# Altium PCB Dashboard.PcbDoc
Units mm, origin at the board's own origin, x right, y up, seen from the top; angles counter-clockwise.
Board outline 121.9 x 100 mm, 2 copper layers (Top Layer, Bottom Layer); 41 components, 91 nets, 229 pads, 85 vias.
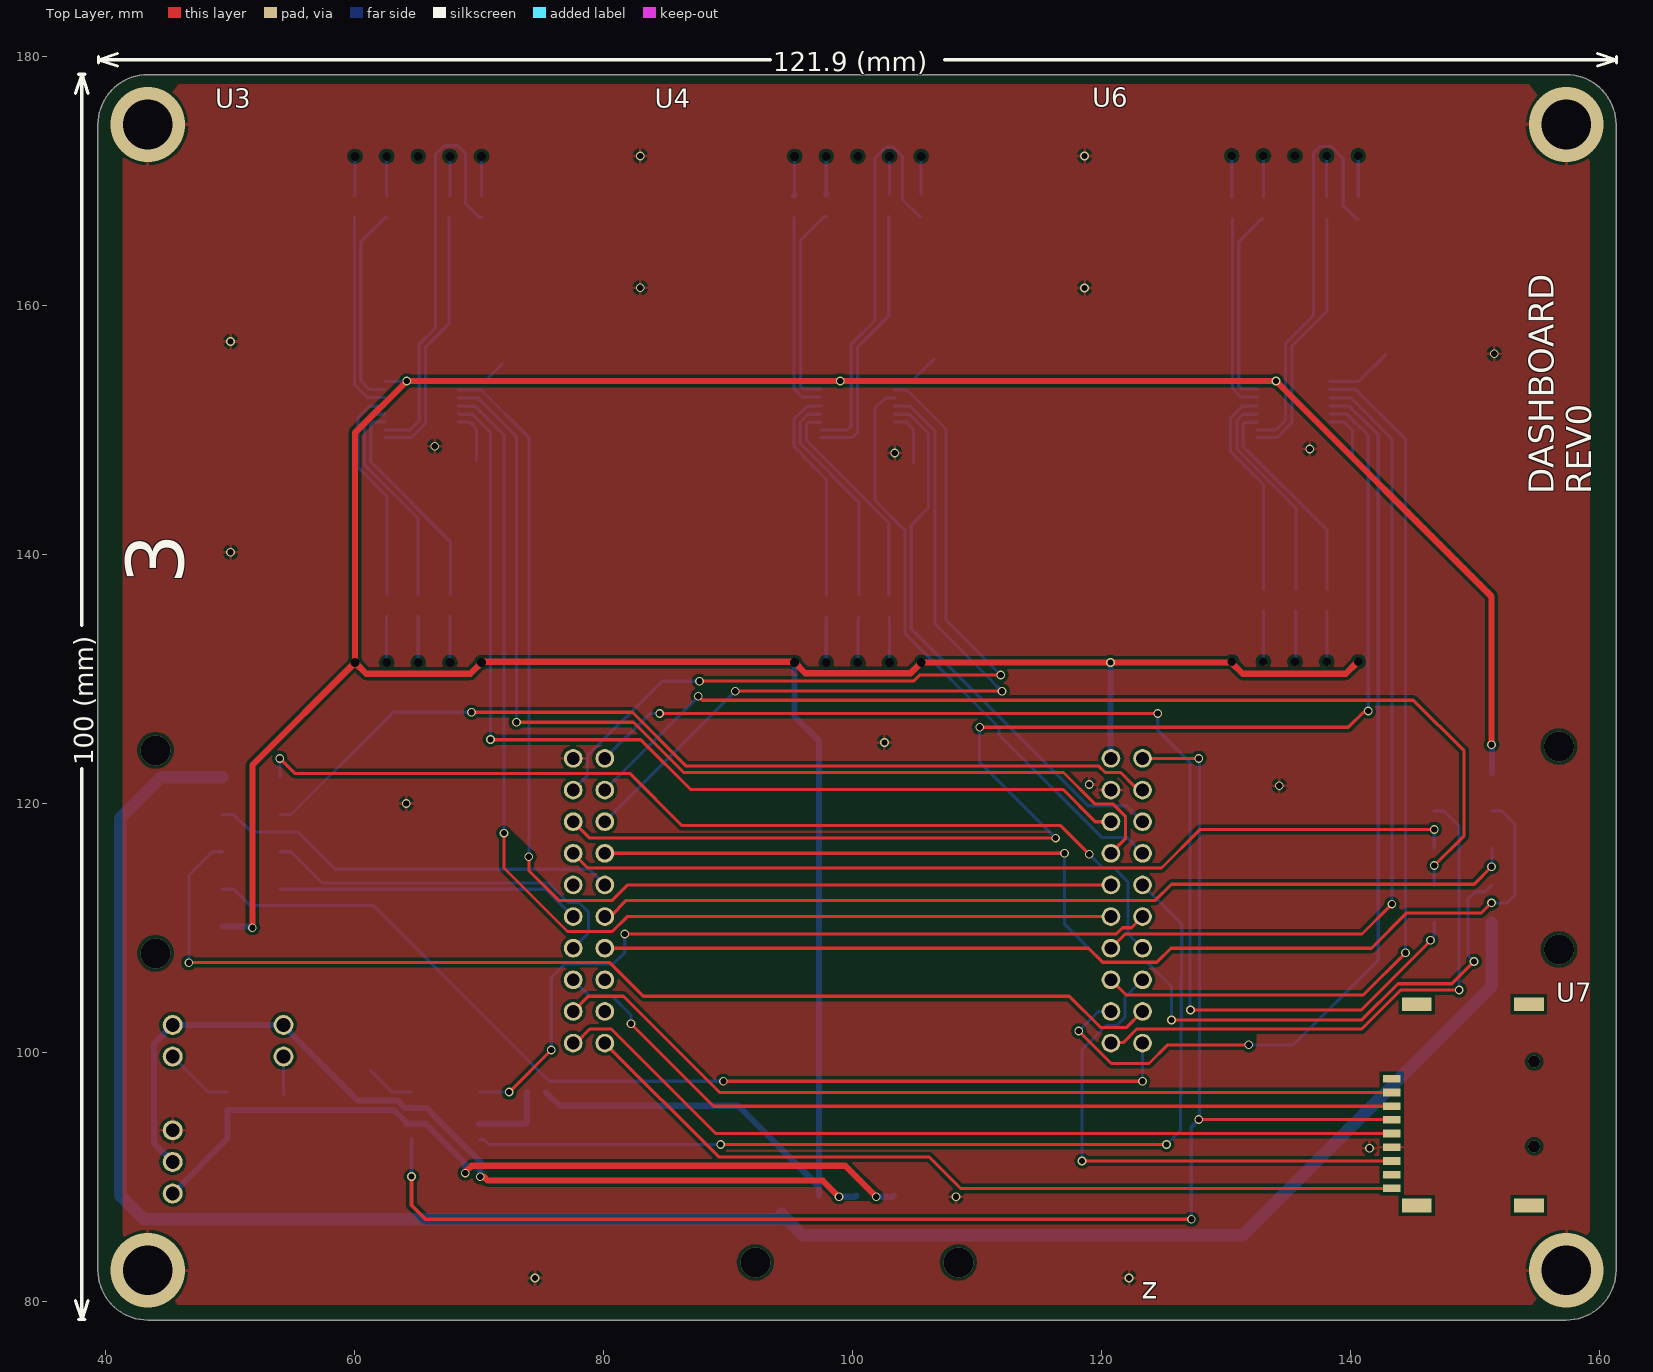
[diagram p0: Top Layer view]
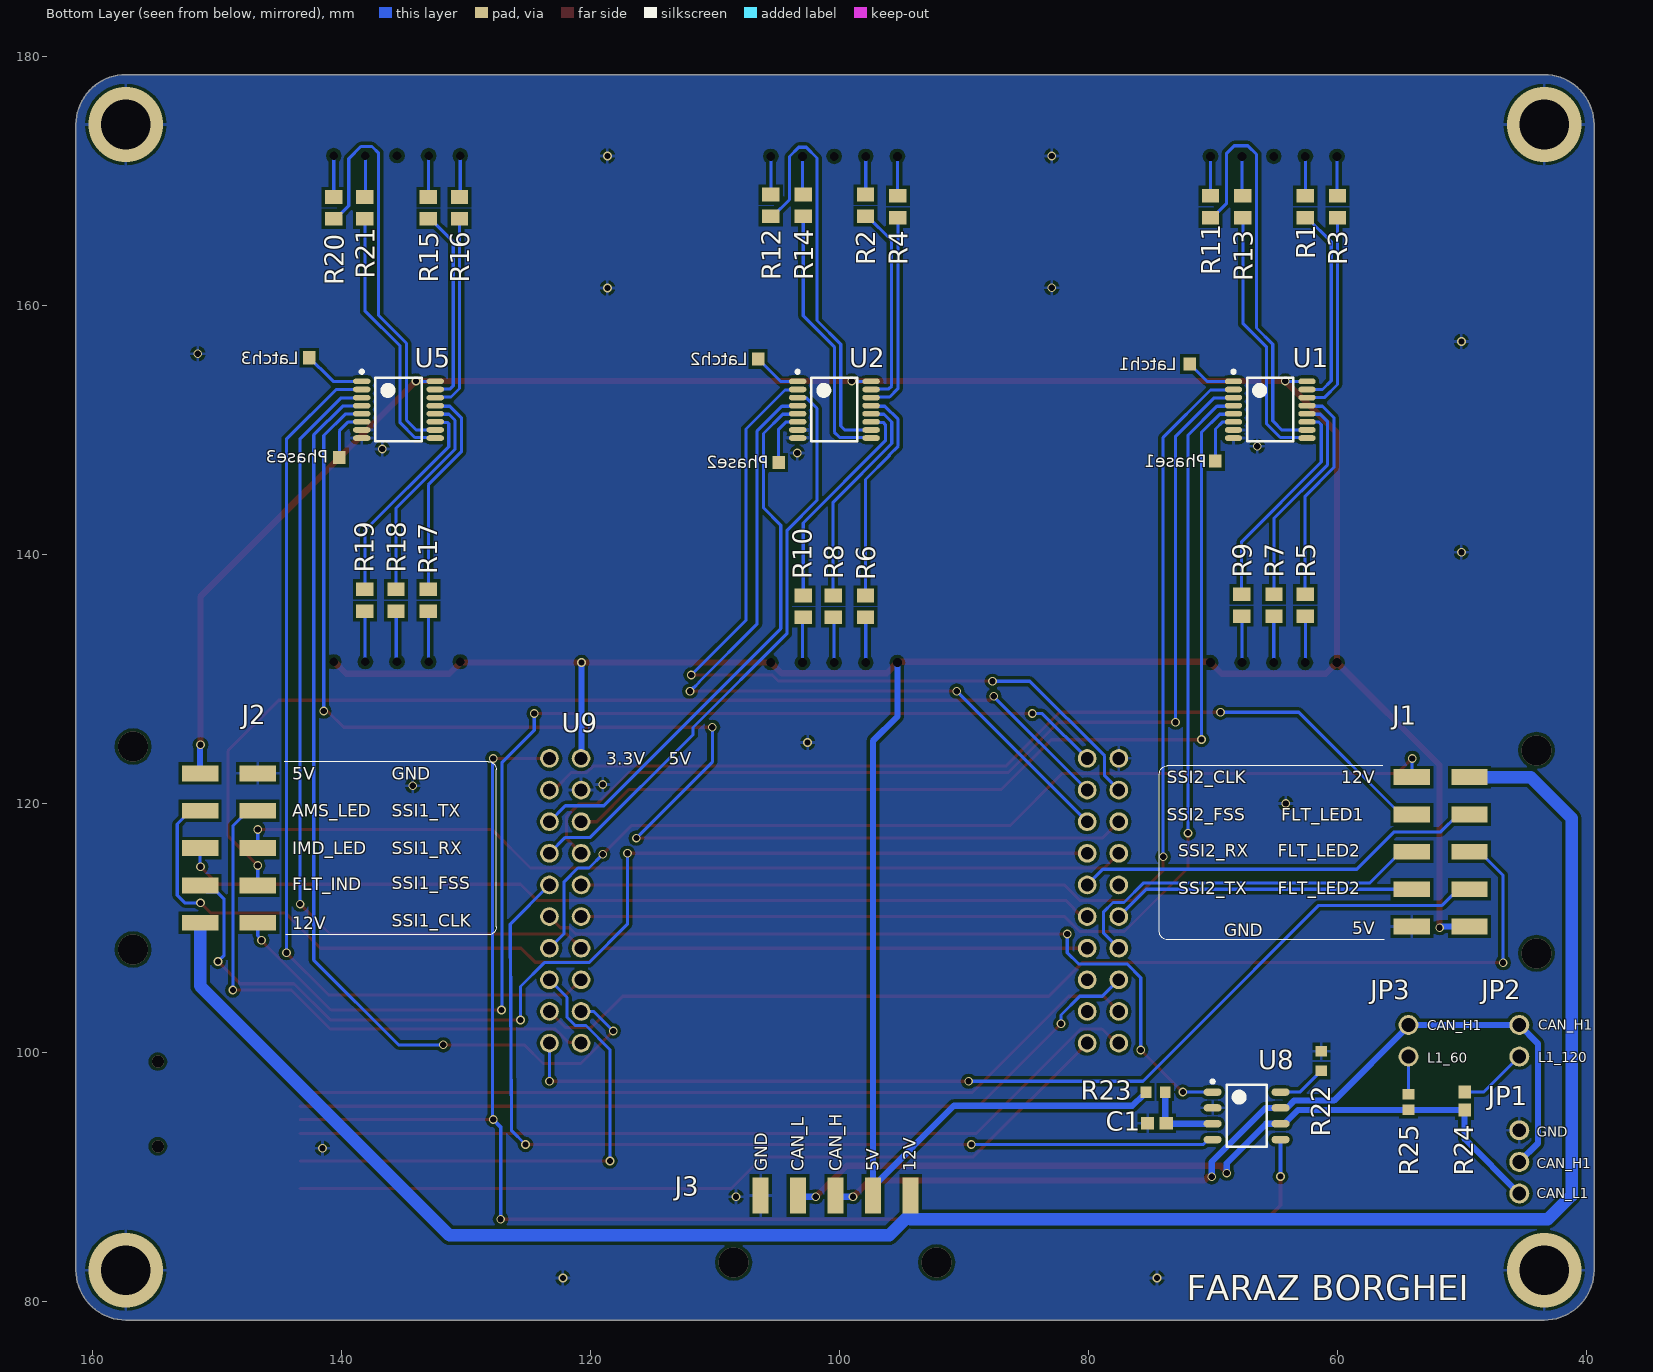
[diagram p1: Bottom Layer view, seen from below]

## Layer stack, top to bottom
Top Solder: solder mask 0.0102, Solder Resist, Dk 3.5
Top Layer: signal copper 0.0356
Dielectric 1: dielectric 0.32, FR-4, Dk 4.8
Bottom Layer: signal copper 0.0356
Bottom Solder: solder mask 0.0102, Solder Resist, Dk 3.5

## Board outline
39.4,82.5 39.4,174.5 cw(c43.4,174.5) 43.4,178.5 157.3,178.5 cw(c157.3,174.5) 161.3,174.5 161.3,82.5 cw(c157.3,82.5) 157.3,78.5 43.4,78.5 cw(c43.4,82.5)

## Design rules (kind name [scope] priority, off if disabled: settings)
Clearance [All] p1: gap=0.254 ignorepadtopadclearanceinfootprint=TRUE except(0: Arc-Hole Track-Hole SMDPad-Hole THPad-Hole Via-Hole Fill-Hole Poly-Hole Region-Hole Text-Hole)
HoleSize [All] p1: absolutevalues=TRUE maxlimit=7 minlimit=0.025 maxpercent=80.000 minpercent=20.000
MinimumSolderMaskSliver [All] p1: minsoldermaskwidth=0.1
NetAntennae [All] p1 off: netantennaetolerance=0
PolygonConnect [All] p1: connectstyle=Relief reliefconductorwidth=0.254 reliefentries=4 polygonreliefangle="90 Angle" airgapwidth=0.254
RoutingVias [All] p1: holewidth=0.711 width=1.27 viastyle="Through Hole" minholewidth=0.5 minwidth=0.5 maxholewidth=6 maxwidth=6
SolderMaskExpansion [All] p1: expansion=0.102
Width [All] p1: maxlimit=1 minlimit=0.1 preferedwidth=0.254 minimp=50.000000 maximp=50.000000 favimp=50.000000
27 further rules are at their usual default settings.

## Classes and differential pairs
component class Headers: J1 J2 J3 U7 U9
component class CANTransceiver: C1 JP1 JP2 JP3 R22 R23 R24 R25 U8
component class 7SegDisplay: R1 R2 R3 R4 R5 R6 R7 R8 R9 R10 R11 R12 R13 R14 R15 R16 R17 R18 R19 R20 R21 U1 U2 U3 U4 U5 U6

## Components (designator, comment, footprint, x,y, rotation, side; value= is the part's Value field where it differs from the comment)
C1 "100nF" CAPC1608X10N 74.5,94.3 r180 bottom
J1 "WM3255CT-ND" MOLEX-10PIN 44.018,124.25 r90 bottom
J2 "WM3255CT-ND" MOLEX-10PIN 156.71,108.25 r270 bottom locked
J3 "23-0436500509CT-ND" MOLEX-5PIN 92.185,83.125 r180 bottom
JP1 "61300311121" 61300311121 45.4,88.66 r270 bottom
JP2 "61300211121" 61300211121 45.4,99.66 r270 bottom
JP3 "61300211121" 61300211121 54.3,99.66 r270 bottom
R1 "200Ohm" RES-0805 62.6,167.9 r90 bottom
R2 "200Ohm" RES-0805 97.9,168 r90 bottom
R3 "200Ohm" RES-0805 60,167.9 r90 bottom
R4 "200Ohm" RES-0805 95.3,167.9 r90 bottom
R5 "200Ohm" RES-0805 62.6,135.9 r270 bottom
R6 "200Ohm" RES-0805 97.9,135.8 r270 bottom
R7 "200Ohm" RES-0805 65.1,135.9 r270 bottom
R8 "200Ohm" RES-0805 100.5,135.8 r270 bottom
R9 "200Ohm" RES-0805 67.7,135.9 r270 bottom
R10 "200Ohm" RES-0805 102.9,135.8 r270 bottom
R11 "200Ohm" RES-0805 70.2,167.9 r90 bottom
R12 "200Ohm" RES-0805 105.5,168 r90 bottom
R13 "200Ohm" RES-0805 67.6,167.9 r90 bottom
R14 "200Ohm" RES-0805 102.9,168 r90 bottom
R15 "200Ohm" RES-0805 133,167.8 r90 bottom
R16 "200Ohm" RES-0805 130.5,167.8 r90 bottom
R17 "200Ohm" RES-0805 133,136.3 r270 bottom
R18 "200Ohm" RES-0805 135.6,136.3 r270 bottom
R19 "200Ohm" RES-0805 138.1,136.3 r270 bottom
R20 "200Ohm" RES-0805 140.6,167.8 r90 bottom
R21 "200Ohm" RES-0805 138.1,167.8 r90 bottom
R22 "0Ohm" RES-0603 61.3,99.3 r90 bottom
R23 "0Ohm" RES-0603 74.6,96.8 r0 bottom
R24 "120 Ohm" RESC1608X06N 49.8,96.1 r90 bottom
R25 "60.4 Ohm" "60.4 OHM RES 0603" 54.3,96 r90 bottom
U1 "7 Seg BCD" TSOP65P640X120-16N 65.4,151.6 r180 bottom
U2 "7 Seg BCD" TSOP65P640X120-16N 100.4,151.6 r180 bottom
U3 "754-2271-ND" SA15-11EWA 60.04,131.3 r0 top
U4 "754-2271-ND" SA15-11EWA 95.34,131.3 r0 top
U5 "7 Seg BCD" TSOP65P640X120-16N 135.4,151.6 r180 bottom
U6 "754-2271-ND" SA15-11EWA 130.44,131.36 r0 top locked
U7 "2073-MEM2075-00-140-01-ACT-ND" SDCARD-NORMAL 143.3,97.875 r90 top
U8 "MCP2562-E/SN" SOIC127P600X175-8N 67.3,94.9 r180 bottom
U9 "EK-TM4C123GXL" "TIVA Headers" 123.28,123.6 r180 bottom locked

## Footprints (in the part's own frame and the unit in brackets; to place one, negate y for a bottom-side part, rotate by r counter-clockwise, add the part's x,y. Pads: shape width x height; smd on the part's side, far side on the other; paste and mask are expansions set on the pad)
"60.4 OHM RES 0603" [mm] "60.4 Ohms ±1% 0.1W, 1/10W Chip Resistor 0603 (1608 Metric) Automotive AEC-Q200 Thick Film"
  rect 0.85x0.95 smd: 1(-0.625,0) 2(0.625,0)
  body extent -0.85,-0.48 0.85,0.47, height 0.55
61300211121 [mm] "Connector Header Through Hole 2 position 0.100\" (2.54mm)"
  round 1.6 hole 1.1: 1(0,0) 2(-2.54,0)
  body extent -3.84,-1.27 1.24,1.27, height 8.27
61300311121 [mm] "Connector Header Through Hole 3 position 0.100\" (2.54mm)"
  round 1.6 hole 1.1: 1(0,0) 2(-2.54,0) 3(-5.08,0)
  body extent -6.35,-1.27 1.27,1.27, height 8.27
CAPC1608X10N [mm] "Chip Capacitor, 2-Leads, Body 1.60x0.80mm, IPC Medium Density"
  rect 1.05x1 smd: 1(-0.75,0) 2(0.75,0)
  body extent -0.87,-0.48 0.88,0.47, height 0.95
MOLEX-5PIN [mm] "Connector Header Surface Mount, Right Angle 5 position 0.118\" (3.00mm)"
  rect 1.27x2.92 smd: 1(-2.09,5.375) 2(-5.115,5.375) 3(-8.115,5.375) 4(-11.14,5.375) 5(-14.14,5.375)
  body extent -17.44,-4.63 1.2,6.11, height 5.14
MOLEX-10PIN [mm] "Connector Header Surface Mount, Right Angle 10 position 0.118\" (3.00mm)"
  rect 1.27x2.92 smd: 1(-2.15,5.38) 2(-5.15,5.38) 3(-8.15,5.38) 4(-11.15,5.38) 5(-14.15,5.38) 6(-2.15,10.01) 7(-5.15,10.01) 8(-8.15,10.01) 9(-11.15,10.01) 10(-14.15,10.01)
  body extent -17.62,-4.6 1.53,10.8, height 8.73
RES-0603 [mm] "Chip Resistor, 2-Leads, Body 1.60x0.80mm, IPC Medium Density"
  rect 0.85x0.9 smd: 1(-0.775,0) 2(0.775,0)
  body extent -0.85,-0.45 0.85,0.45, height 0.55
RES-0805 [mm] "Chip Resistor, 2-Leads, Body 2.00x1.25mm, IPC Medium Density"
  rect 1.1x1.4 smd: 1(-0.875,0) 2(0.875,0)
  body extent -1.07,-0.7 1.07,0.7, height 0.6
RESC1608X06N [mm] "Chip Resistor, 2-Leads, Body 1.60x0.80mm, IPC Medium Density"
  rect 1.05x1 smd: 1(-0.725,0) 2(0.725,0)
  body extent -0.9,-0.5 0.9,0.5, height 0.55
SA15-11EWA [mm] "1.5\" 7 Segment Display"
  round 0.5 hole 0.7: 1(0,0) 2(2.54,0) 3(5.08,0) 4(7.62,0) 5(10.16,0) 6(10.16,40.64) 7(7.62,40.64) 8(5.08,40.64) 9(2.54,40.64) 10(0,40.64)
  body extent -11.48,-3.2 21.68,43.8, height 12.5
SDCARD-NORMAL [mm] "9 (8 + 1) Position Card Connector microSD™ Surface Mount, Right Angle Gold"
  rect 0.62x1.4 smd: 1(0,0) 2(-1.1,0) 3(-2.2,0) 4(-3.3,0) 5(-4.4,0) 6(-5.5,0) 7(-6.6,0) 8(-7.7,0) 9(-8.8,0)
  rect 1.1x2.4 smd: 10(-10.175,-11) 10(-10.175,-2) 10(5.975,-2) 10(5.975,-11)
SOIC127P600X175-8N [mm] "SOIC, 8-Leads, Body 4.90x3.90mm, Pitch 1.27mm, IPC Medium Density"
  oval 1.45x0.6 smd: 1(-2.725,1.905) 2(-2.725,0.635) 3(-2.725,-0.635) 4(-2.725,-1.905) 5(2.725,-1.905) 6(2.725,-0.635) 7(2.725,0.635) 8(2.725,1.905)
  silkscreen extent -2.85,-2.5 1.6,2.88, body extent -3,-2.5 3,2.5, height 1.75
"TIVA Headers" [mm]
  round 1.5 hole 1.02: 1(0,0) 2(0,-2.54) 3(0,-5.08) 4(0,-7.62) 5(0,-10.16) 6(0,-12.7) 7(0,-15.24) 8(0,-17.78) 9(0,-20.32) 10(0,-22.86) 21(45.72,0) 22(45.72,-2.54) 23(45.72,-5.08) 24(45.72,-7.62) 25(45.72,-10.16) 26(45.72,-12.7) 27(45.72,-15.24) 28(45.72,-17.78) 29(45.72,-20.32) 30(45.72,-22.86) 31(2.54,0) 32(2.54,-2.54) 33(2.54,-5.08) 34(2.54,-7.62) 35(2.54,-10.16) 36(2.54,-12.7) 37(2.54,-15.24) 38(2.54,-17.78) 39(2.54,-20.32) 40(2.54,-22.86) 41(43.18,0) 42(43.18,-2.54) 43(43.18,-5.08) 44(43.18,-7.62) 45(43.18,-10.16) 46(43.18,-12.7) 47(43.18,-15.24) 48(43.18,-17.78) 49(43.18,-20.32) 50(43.18,-22.86)
  body extent -1.33,-24.1 46.97,1.6, height 8.55
TSOP65P640X120-16N [mm] "TSOP, 16-Leads, Body 5.00x4.40mm, Pitch 0.65mm, IPC Medium Density"
  oval 1.4x0.45 smd: 1(-2.95,2.275) 2(-2.95,1.625) 3(-2.95,0.975) 4(-2.95,0.325) 5(-2.95,-0.325) 6(-2.95,-0.975) 7(-2.95,-1.625) 8(-2.95,-2.275) 9(2.95,-2.275) 10(2.95,-1.625) 11(2.95,-0.975) 12(2.95,-0.325) 13(2.95,0.325) 14(2.95,0.975) 15(2.95,1.625) 16(2.95,2.275)
  silkscreen extent -3.08,-2.55 1.85,3.17, body extent -3.2,-2.55 3.2,2.55, height 1.2

## Part data
C1: library part C0603C104K4RAC7411, "Cap Ceramic 0.1uF 16V X7R 10% SMD 0603 125C Paper T/R", Case/Package=0603, Case Code (Metric)=1608, Dielectric=X7R, Dielectric Material=Ceramic, Manufacturer=KEMET, Max Operating Temperature=125°C, Min Operating Temperature=-55°C, Package Quantity=10000, Supplier Part Number 1=399-17393-1-ND, Tolerance=10%, Voltage Rating=16V, Capacitance=100nF, Case Code (Imperial)=0603, ComponentLink1Description=https://datasheet.ciiva.com/5411/kem-c1002-x7r-smd-357932-5411657.pdf?src-supplier=Mouser, ComponentLink1URL=https://datasheet.ciiva.com/5411/kem-c1002-x7r-smd-357932-5411657.pdf?src-supplier=Mouser, Depth=0.8mm, Dissipation Factor=3.5%, Height=0.8mm, Lead Pitch=0.7mm, Length=1.6mm, Manufacturer Part Number=C0603C104K4RAC7411, Mount="Surface Mount", Packaging="Tape and Reel", Pricing 1="1=0.14000, 10=0.09800, 100=0.04620, 500=0.03240, 1000=0.02683, 2500=0.02497, 5000=0.02285 (USD)", Radiation Hardening=No, RoHS=Yes, Stock 1=26049, Supplier 1=Digi-Key, Termination=SMD/SMT, Voltage Rating (DC)=16V, Width=0.8mm
J1 J2: library part MOLEX-10PIN, "HEADER R/A 10POS DUAL TIN SMD", Color=Black, Contact Resistance=10mR, Manufacturer=Molex, Manufacturer Part Number=0430451006, Max Operating Temperature=105°C, Min Operating Temperature=-40°C, ComponentLink1Description=https://datasheet.ciiva.com/737/430450407-sd-737953.pdf?src-supplier=Digi-Key, ComponentLink1URL=https://datasheet.ciiva.com/737/430450407-sd-737953.pdf?src-supplier=Digi-Key, Connector Type="Male Pin", Contact Material=Brass, Contact Plating=Tin, Depth=15.4mm, Fastening Type=Latch, Housing Color=Black, Housing Material=Polymer, Length=19.15mm, Mount="Surface Mount", Number of Contacts=10, Number of Positions=10, Number of Rows=2, Orientation="Right Angle", Packaging="Tape and Reel", Pitch=3mm, Pricing 1="1=3.72000, 10=3.57200, 100=2.97680 (USD)", RoHS=Yes, Row Spacing=0.118inch, Stock 1=2460, Supplier 1=Digi-Key, Supplier Part Number 1=WM3255CT-ND, Termination=Solder
J3: library part 0436500509, "GLOVE, POLYAMIDE, L/FREE, PU, SIZE 6 - More Details", Color=Black, Current Rating=5A, Manufacturer=Molex, Max Operating Temperature=105°C, Max Voltage Rating (AC)=250V, Min Operating Temperature=-40°C, Package Quantity=10, Voltage Rating=600V, ComponentLink1Description=https://datasheet.ciiva.com/712/436501209-sd-712211.pdf?src-supplier=Digi-Key, ComponentLink1URL=https://datasheet.ciiva.com/712/436501209-sd-712211.pdf?src-supplier=Digi-Key, ComponentLink2Description=https://datasheet.ciiva.com/16089/0436500509-pcb-headers-16089055.pdf?src-supplier=Onlinecomponents.com, ComponentLink2URL=https://datasheet.ciiva.com/16089/0436500509-pcb-headers-16089055.pdf?src-supplier=Onlinecomponents.com, Connector Type="Male Pin", Contact Gender=Male, Contact Material=Brass, Contact Plating=Tin, Fastening Type=Ramp, Gender=Male, Glow Wire Compliant=Compliant, Halogen Free="Low Halogen", Housing Color=Black, Housing Material=Polymer, Manufacturer Part Number=0436500509, Mount="Surface Mount", Number of Circuits=5, Number of Contacts=5, Number of Positions=5, Number of Rows=1, Orientation="Right Angle", Packaging="Tape and Reel", Pitch=3mm, Pricing 1="1=2.58000, 10=2.34500, 100=2.00970 (USD)", RoHS=Yes, Stock 1=8420, Supplier 1=Digi-Key, Supplier Part Number 1=23-0436500509CT-ND, Termination=Solder, Voltage Rating (DC)=250V
JP1: "WURTH ELEKTRONIK - 61300311121 - HEADER, 2.54MM, PIN, THT, VERTICAL, 3WAY", Color=Black, Manufacturer="Wurth Electronics", Supplier Part Number 1=732-5316-ND, ComponentLink1Description=http://www.farnell.com/cad/1737268.pdf?src-supplier=Element14, ComponentLink1URL=http://www.farnell.com/cad/1737268.pdf?src-supplier=Element14, ComponentLink2Description=https://katalog.we-online.de/em/datasheet/6130xx11121.pdf?src-supplier=Digi-Key, ComponentLink2URL=https://katalog.we-online.de/em/datasheet/6130xx11121.pdf?src-supplier=Digi-Key, Connector Type="Male Pin", Contact Material=Copper, Contact Mating Length=0.236inch, Contact Plating=Gold, Gender=Male, Lead Free="Lead Free", Manufacturer Part Number=61300311121, Mount="Through Hole", Number of Contacts=3, Number of Positions=3, Number of Rows=1, Packaging=Bulk, Pitch=0.1inch, Pricing 1="1=0.13000, 10=0.10600, 25=0.08800, 50=0.07400, 100=0.06700, 1000=0.06100 (USD)", REACH SVHC=Unknown, RoHS=Yes, Stock 1=56311, Supplier 1=Digi-Key, Termination=Solder
JP2 JP3: "Headers & Wire Housings WR-PHD 2.54mm 2Pin THT Header", Color=Black, Current Rating=3A, Manufacturer="Wurth Electronics", Max Operating Temperature=125°C, Min Operating Temperature=-40°C, Supplier Part Number 1=732-5315-ND, Voltage Rating=250V, ComponentLink1Description=https://datasheet.ciiva.com/13619/6130xx11121-48870-13619345.pdf?src-supplier=Mouser, ComponentLink1URL=https://datasheet.ciiva.com/13619/6130xx11121-48870-13619345.pdf?src-supplier=Mouser, Connector Type="Male Pin", Contact Gender=Male, Contact Material="Copper Alloy,Copper", Contact Mating Length=0.236inch, Contact Plating=Gold, Gender=Male, Housing Material=PBT, Lead Free="Lead Free", Manufacturer Part Number=61300211121, Mount="Through Hole", Number of Contacts=2, Number of Positions=2, Number of Rows=1, Packaging=Bulk, Pitch=0.1inch, Pricing 1="1=0.13000, 10=0.10600, 25=0.08800, 50=0.07400, 100=0.06700, 1000=0.06100 (USD)", REACH SVHC=Unknown, RoHS=Yes, Stock 1=191551, Supplier 1=Digi-Key, Termination="Through Hole"
R1 R2 R3 R4 R5 R6 R7 R8 R9 R10 R11 R12 R13 R14 R15 R16 R17 R18 R19 R20 R21: library part RNCP0805FTD200R, "RES SMD 200 OHM 1% 1/4W 0805", Case/Package=0805, Case Code (Metric)=2012, Manufacturer="Stackpole Electronics", Max Operating Temperature=155°C, Max Power Dissipation=250mW, Min Operating Temperature=-55°C, Resistance=200R, Supplier Part Number 1=RNCP0805FTD200RCT-ND, Temperature Coefficient=100ppm/°C, Tolerance=1%, Case Code (Imperial)=0805, ComponentLink1Description=http://www.seielect.com/Catalog/SEI-rncp.pdf?src-supplier=Digi-Key, ComponentLink1URL=http://www.seielect.com/Catalog/SEI-rncp.pdf?src-supplier=Digi-Key, ComponentLink2Description=https://www.seielect.com/catalog/SEI-Packaging.pdf?src-supplier=Digi-Key, ComponentLink2URL=https://www.seielect.com/catalog/SEI-Packaging.pdf?src-supplier=Digi-Key, ComponentLink3Description=https://www.seielect.com/Catalog/SEI-rncp.pdf?src-supplier=Avnet, ComponentLink3URL=https://www.seielect.com/Catalog/SEI-rncp.pdf?src-supplier=Avnet, Composition="Thin Film", Features="Moisture Resistant,Anti-Sulfur", Height=0.024inch, Length=0.079inch, Manufacturer Part Number=RNCP0805FTD200R, Mount="Surface Mount", Number of Terminations=2, Packaging="Tape and Reel", Pricing 1="1=0.10000, 10=0.07200, 100=0.02770, 1000=0.01220, 2500=0.01053 (USD)", RoHS=Yes, Stock 1=80873, Supplier 1=Digi-Key, Width=0.049inch
R22 R23: library part RC0603JR-070RL, "RES SMD 0 OHM JUMPER 1/10W 0603", Case/Package=0603, Case Code (Metric)=1608, Manufacturer=Yageo, Max Operating Temperature=155°C, Min Operating Temperature=-55°C, Package Quantity=5000, Power Rating=100mW, Resistance=0mR, Supplier Part Number 1=311-0.0GRCT-ND, Temperature Coefficient=200ppm/°C, Tolerance=1%, Voltage Rating=50V, Case Code (Imperial)=0603, ComponentLink1Description=https://datasheet.ciiva.com/11808/pyu-r-int-6-11808700.pdf?src-supplier=RSComponents, ComponentLink1URL=https://datasheet.ciiva.com/11808/pyu-r-int-6-11808700.pdf?src-supplier=RSComponents, ComponentLink2Description=https://datasheet.ciiva.com/7746/1738695-7746421.pdf?src-supplier=Element14, ComponentLink2URL=https://datasheet.ciiva.com/7746/1738695-7746421.pdf?src-supplier=Element14, ComponentLink3Description=https://datasheet.ciiva.com/8883/pyu-rc0603-51-rohs-l-4-8883045.pdf?src-supplier=Avnet, ComponentLink3URL=https://datasheet.ciiva.com/8883/pyu-rc0603-51-rohs-l-4-8883045.pdf?src-supplier=Avnet, ComponentLink4Description=https://datasheet.ciiva.com/15189/getdatasheetpartid-329462-15189845.pdf?src-supplier=Verical, ComponentLink4URL=https://datasheet.ciiva.com/15189/getdatasheetpartid-329462-15189845.pdf?src-supplier=Verical, ComponentLink5Description=https://datasheet.ciiva.com/7746/1738695-7746422.pdf?src-supplier=Element14, ComponentLink5URL=https://datasheet.ciiva.com/7746/1738695-7746422.pdf?src-supplier=Element14, ComponentLink6Description=https://datasheet.ciiva.com/12555/rc0603-272842-12555254.pdf?src-supplier=Mouser, ComponentLink6URL=https://datasheet.ciiva.com/12555/rc0603-272842-12555254.pdf?src-supplier=Mouser, ComponentLink7Description=https://datasheet.ciiva.com/22747/443971-22747530.pdf?src-supplier=Element14, ComponentLink7URL=https://datasheet.ciiva.com/22747/443971-22747530.pdf?src-supplier=Element14, Composition="Thick Film", Contact Plating=Tin,Matte, Depth=0.8mm, Height=0.45mm, Lead Free="Lead Free", Length=1.6mm, Manufacturer Part Number=RC0603JR-070RL, Military Standard=Not, Number of Pins=2, Packaging="Tape and Reel", Pricing 1="1=0.10000, 10=0.01900, 25=0.01360, 50=0.01040, 100=0.00770, 250=0.00588, 500=0.00472, 1000=0.00347 (USD)", Radiation Hardening=No, REACH SVHC="No SVHC", RoHS=Yes, Stock 1=36135548, Supplier 1=Digi-Key, Termination=SMD/SMT, Voltage Rating (DC)=50V, Width=0.8mm
R24: library part ERA-3AEB121V, "Metal film resistor 120 ? SMD 0603 0.1 W", Case/Package=0603, Case Code (Metric)=1608, Manufacturer=Panasonic, Max Operating Temperature=155°C, Max Power Dissipation=100mW, Min Operating Temperature=-55°C, Package Quantity=1, Resistance=120R, Supplier Part Number 1=P120DBCT-ND, Temperature Coefficient=25ppm/°C, Tolerance=0.1%, Voltage Rating=75V, Case Code (Imperial)=0603, ComponentLink1Description=https://datasheet.ciiva.com/11808/0900766b80fe20f7-11808026.pdf?src-supplier=RSComponents, ComponentLink1URL=https://datasheet.ciiva.com/11808/0900766b80fe20f7-11808026.pdf?src-supplier=RSComponents, ComponentLink2Description=https://datasheet.ciiva.com/22737/1776116-22737254.pdf?src-supplier=Element14, ComponentLink2URL=https://datasheet.ciiva.com/22737/1776116-22737254.pdf?src-supplier=Element14, ComponentLink3Description=https://datasheet.ciiva.com/30214/54aoa0000ce26-30214359.pdf?src-supplier=Onlinecomponents.com, ComponentLink3URL=https://datasheet.ciiva.com/30214/54aoa0000ce26-30214359.pdf?src-supplier=Onlinecomponents.com, ComponentLink4Description=https://datasheet.ciiva.com/48425/era-eng-tds-48425415.pdf?src-supplier=Distrelec, ComponentLink4URL=https://datasheet.ciiva.com/48425/era-eng-tds-48425415.pdf?src-supplier=Distrelec, ComponentLink5Description=https://datasheet.ciiva.com/5999/485442-5999048.pdf?src-supplier=Farnell, ComponentLink5URL=https://datasheet.ciiva.com/5999/485442-5999048.pdf?src-supplier=Farnell, ComponentLink6Description=https://datasheet.ciiva.com/43455/485442-43455209.pdf?src-supplier=Farnell, ComponentLink6URL=https://datasheet.ciiva.com/43455/485442-43455209.pdf?src-supplier=Farnell, ComponentLink7Description=https://datasheet.ciiva.com/43457/485442-43457753.pdf?src-supplier=Farnell, ComponentLink7URL=https://datasheet.ciiva.com/43457/485442-43457753.pdf?src-supplier=Farnell, ComponentLink8Description=https://datasheet.ciiva.com/48534/era-eng-tds-48534505.pdf?src-supplier=Distrelec, ComponentLink8URL=https://datasheet.ciiva.com/48534/era-eng-tds-48534505.pdf?src-supplier=Distrelec, ComponentLink9Description=https://datasheet.ciiva.com/5999/485442-5999050.pdf?src-supplier=Farnell, ComponentLink9URL=https://datasheet.ciiva.com/5999/485442-5999050.pdf?src-supplier=Farnell, ComponentLink10Description=https://datasheet.ciiva.com/9117/aoa0000ce26-9117338.pdf?src-supplier=Avnet, ComponentLink10URL=https://datasheet.ciiva.com/9117/aoa0000ce26-9117338.pdf?src-supplier=Avnet, ComponentLink11Description=https://datasheet.ciiva.com/9186/aoa0000ce26-9186155.pdf?src-supplier=Avnet, ComponentLink11URL=https://datasheet.ciiva.com/9186/aoa0000ce26-9186155.pdf?src-supplier=Avnet, Composition="Thin Film", Contact Plating=Tin, Depth=0.8mm, Features="Automotive AEC-Q200", Height=0.45mm, Lead Free="Lead Free", Length=1.6mm, Manufacturer Part Number=ERA-3AEB121V, Military Standard=Not, Mount="Surface Mount", Number of Pins=2, Number of Terminations=2, Packaging="Tape and Reel", Power Rating=100mW, Pricing 1="1=0.35000, 10=0.30000, 100=0.11730, 1000=0.04908, 2500=0.04499 (USD)", Radiation Hardening=No, REACH SVHC="No SVHC", RoHS=Yes, Stock 1=121177, Supplier 1=Digi-Key, Termination=SMD/SMT, Voltage Rating (DC)=75V, Width=0.8mm
R25: library part RMCF0603FT60R4, "RES 60.4 OHM 1% 1/10W 0603", Case/Package=0603, Case Code (Metric)=1608, Manufacturer="Stackpole Electronics", Max Operating Temperature=155°C, Max Power Dissipation=100mW, Min Operating Temperature=-55°C, Resistance=60.4R, Supplier Part Number 1=RMCF0603FT60R4CT-ND, Temperature Coefficient=100ppm/°C, Tolerance=1%, Case Code (Imperial)=0603, ComponentLink1Description=http://components.arrow.com/part/dataview/50499519S121523N1174?src-supplier=Arrow, ComponentLink1URL=http://components.arrow.com/part/dataview/50499519S121523N1174?src-supplier=Arrow, ComponentLink2Description=https://www.seielect.com/catalog/SEI-RMCF_RMCP.pdf?src-supplier=Avnet, ComponentLink2URL=https://www.seielect.com/catalog/SEI-RMCF_RMCP.pdf?src-supplier=Avnet, ComponentLink3Description=https://www.seielect.com/catalog/SEI-Packaging.pdf?src-supplier=Digi-Key, ComponentLink3URL=https://www.seielect.com/catalog/SEI-Packaging.pdf?src-supplier=Digi-Key, Composition="Thick Film", Contact Plating=Tin,Matte, Features="Automotive AEC-Q200", Height=0.022inch, Lead Free="Lead Free", Length=0.061inch, Manufacturer Part Number=RMCF0603FT60R4, Mount="Surface Mount", Number of Terminations=2, Packaging="Tape and Reel", Pricing 1="1=0.10000, 10=0.01600, 100=0.00650, 1000=0.00292, 2500=0.00253 (USD)", Radiation Hardening=No, RoHS=Yes, Stock 1=27338, Supplier 1=Digi-Key, Width=0.031inch
U1 U2 U5: library part CD4543BPWR, "IC BCD7SEG LCH/DECD/DRVR 16TSSOP", Case/Package=TSSOP, High Level Output Current=-3.33mA, Low Level Output Current=4.2mA, Manufacturer="Texas Instruments", Max Operating Temperature=125°C, Max Supply Voltage=18V, Min Input Voltage=3V, Min Operating Temperature=-55°C, Operating Supply Current=40nA, Package Quantity=1, Quiescent Current=100uA, Supplier Part Number 1=296-17106-1-ND, Bandwidth=8MHz, ComponentLink1Description=https://datasheet.ciiva.com/14294/cd4543b-14294665.pdf?src-supplier=Avnet, ComponentLink1URL=https://datasheet.ciiva.com/14294/cd4543b-14294665.pdf?src-supplier=Avnet, ComponentLink2Description=https://datasheet.ciiva.com/1940/cd4543b-1940490.pdf?src-supplier=Digi-Key, ComponentLink2URL=https://datasheet.ciiva.com/1940/cd4543b-1940490.pdf?src-supplier=Digi-Key, ComponentLink3Description=https://datasheet.ciiva.com/1940/cd4543b-1940491.pdf?src-supplier=Digi-Key, ComponentLink3URL=https://datasheet.ciiva.com/1940/cd4543b-1940491.pdf?src-supplier=Digi-Key, ComponentLink4Description=https://datasheet.ciiva.com/1940/cd4543b-1940492.pdf?src-supplier=Digi-Key, ComponentLink4URL=https://datasheet.ciiva.com/1940/cd4543b-1940492.pdf?src-supplier=Digi-Key, Contact Plating=Gold, Display Type=LCD, Lead Free="Lead Free", Logic Function=Demultiplexer,Decoder, Manufacturer Part Number=CD4543BPWR, Min Supply Voltage=3V, Number of Bits=7, Number of Channels=4, Number of Elements=1, Number of Input Lines=4, Number of Inputs=4, Number of Output Lines=7, Number of Outputs=7, Number of Pins=16, Packaging="Tape and Reel", Polarity=Non-Inverting, Pricing 1="1=0.42000, 10=0.35900, 100=0.26820, 500=0.21074, 1000=0.16284 (USD)", Propagation Delay=400ns, RoHS=Yes, Stock 1=1809, Supplier 1=Digi-Key, Turn-On Delay Time=1200ns, Weight=0.002183oz
U3 U4 U6: library part SA15-11EWA, "DISPLAY, SEVEN SEGMENT, 47MM, RED, COMMON ANODE", Case/Package=DIP, Color=Red, Forward Current=30mA, Forward Voltage=4V, Manufacturer=Kingbright, Max Operating Temperature=85°C, Max Power Dissipation=150mW, Min Operating Temperature=-40°C, Operating Supply Voltage=2V, Package Quantity=15, Test Current=20mA, ComponentLink1Description=https://datasheet.ciiva.com/2105/sa15-11ewa-2105137.pdf?src-supplier=Digi-Key, ComponentLink1URL=https://datasheet.ciiva.com/2105/sa15-11ewa-2105137.pdf?src-supplier=Digi-Key, ComponentLink2Description=https://datasheet.ciiva.com/4421/sa15-11ewa-49819-4421892.pdf?src-supplier=Mouser, ComponentLink2URL=https://datasheet.ciiva.com/4421/sa15-11ewa-49819-4421892.pdf?src-supplier=Mouser, ComponentLink3Description=https://datasheet.ciiva.com/1230/57137-1230472.pdf?src-supplier=Element14, ComponentLink3URL=https://datasheet.ciiva.com/1230/57137-1230472.pdf?src-supplier=Element14, ComponentLink4Description=https://datasheet.ciiva.com/1230/28421-1230493.pdf?src-supplier=Element14, ComponentLink4URL=https://datasheet.ciiva.com/1230/28421-1230493.pdf?src-supplier=Element14, Element Configuration="Common Anode", Height=1.85inch, Illumination Color=Red, Luminous Intensity=16mcd, Manufacturer Part Number=SA15-11EWA, Number of Characters=1, Packaging=Rail/Tube, Pricing 1="1=3.36000, 10=2.80000, 100=1.96000, 500=1.62400 (USD)", REACH SVHC="No SVHC", RoHS=Yes, Stock 1=760, Supplier 1=Digi-Key, Supplier Part Number 1=754-2271-ND, Wavelength=625nm, Width=1.306inch
U7: library part "SDCARD CONN.", "850NM POINT SOURCE LED ASSY", Manufacturer="Global Connector Technology", Manufacturer Part Number=MEM2075-00-140-01-A, Supplier Part Number 1=56AC1963, Pricing 1="1=1.68000, 10=1.53000, 25=1.53000, 50=1.53000, 100=1.42000, 250=1.42000, 500=1.32000, 1000=1.23000, 1=1.26000, 10=1.15000, 25=1.15000, 50=1.15000, 100=1.07000, 250=1.07000, 500=0.98600, 1000=0.92000 (CAD)", RoHS=No, Stock 1=1028, Supplier 1=Newark
U8: "Interface IC CAN SO-8", Case/Package=SOIC, Manufacturer=Microchip, Max Operating Temperature=125°C, Max Supply Current=70mA, Max Supply Voltage=5.5V, Min Operating Temperature=-40°C, Min Supply Voltage=4.5V, Package Quantity=100, Supplier Part Number 1=MCP2562-E/SN-ND, ComponentLink1Description=https://datasheet.ciiva.com/26922/getdatasheetpartid-776214-26922473.pdf?src-supplier=Verical, ComponentLink1URL=https://datasheet.ciiva.com/26922/getdatasheetpartid-776214-26922473.pdf?src-supplier=Verical, ComponentLink2Description=https://datasheet.ciiva.com/24192/filehandler-aspxddocname-en561044-24192158.pdf?src-supplier=Future+Electronics, ComponentLink2URL=https://datasheet.ciiva.com/24192/filehandler-aspxddocname-en561044-24192158.pdf?src-supplier=Future+Electronics, ComponentLink3Description=https://datasheet.ciiva.com/39123/21125167b-39123503.pdf?src-supplier=Onlinecomponents.com, ComponentLink3URL=https://datasheet.ciiva.com/39123/21125167b-39123503.pdf?src-supplier=Onlinecomponents.com, ComponentLink4Description=https://datasheet.ciiva.com/22747/1755821-22747911.pdf?src-supplier=Element14, ComponentLink4URL=https://datasheet.ciiva.com/22747/1755821-22747911.pdf?src-supplier=Element14, ComponentLink5Description=https://datasheet.ciiva.com/18624/25167b-18624808.pdf?src-supplier=Digi-Key, ComponentLink5URL=https://datasheet.ciiva.com/18624/25167b-18624808.pdf?src-supplier=Digi-Key, ComponentLink6Description=https://datasheet.ciiva.com/29898/25167b-29898006.pdf?src-supplier=Avnet, ComponentLink6URL=https://datasheet.ciiva.com/29898/25167b-29898006.pdf?src-supplier=Avnet, ComponentLink7Description=https://datasheet.ciiva.com/48512/mcp2562-eng-tds-48512071.pdf?src-supplier=Distrelec, ComponentLink7URL=https://datasheet.ciiva.com/48512/mcp2562-eng-tds-48512071.pdf?src-supplier=Distrelec, Data Rate=1Mbps, Height=1.5mm, Interface=CAN,LIN, Lead Free="Lead Free", Length=4.9mm, Logic Function=Transceiver, Manufacturer Part Number=MCP2562-E/SN, Mount="Surface Mount", Nominal Supply Current=70mA, Number of Drivers=1, Number of Pins=8, Number of Receive Buffers=1, Number of Receivers=1, Number of Transceivers=1, Number of Transmit Buffers=1, Packaging=Rail/Tube, Pricing 1="1=0.90000, 25=0.75000, 100=0.68000 (USD)", Propagation Delay=125ns, Radiation Hardening=No, REACH SVHC="No SVHC", RoHS=Yes, Stock 1=3084, Supplier 1=Digi-Key, Turn-On Delay Time=125ns, Width=3.9mm
U9: library part PH2-20-UA, "PH Series 20 Position Through-Hole Dual Row Straight .100 Header", Manufacturer="Adam Equipment", Supplier Part Number 1=2057-PH2-20-UA-ND, ComponentLink1Description=https://datasheet.ciiva.com/16479/page-312-315-16479356.pdf?src-supplier=Future+Electronics, ComponentLink1URL=https://datasheet.ciiva.com/16479/page-312-315-16479356.pdf?src-supplier=Future+Electronics, Contact Plating=Gold, Lead Free="Lead Free", Manufacturer Part Number=PH2-20-UA, Mount="Through Hole", Number of Positions=20, Packaging=Bag, Pitch=2.54mm, Pricing 1="1=0.26000, 10=0.24700, 100=0.17300, 500=0.14826, 1000=0.12355, 5000=0.10590, 10000=0.09884 (USD)", RoHS=Yes, Stock 1=6280, Supplier 1=Digi-Key, Termination=Solder

## Free pads (board coordinates)
  rect 1x1.05 smd far side: 2(69.8,147.475) 2(71.875,155.275) 2(104.875,147.35) 2(106.525,155.675) 2(140.15,147.775) 2(142.575,155.775)

## Via types
v1: diameter 0.7, hole 0.5, Top Layer to Bottom Layer, 73 vias
v2: diameter 2.41, hole 2.41, Top Layer to Bottom Layer, 6 vias
v3: diameter 6, hole 4, Top Layer to Bottom Layer, 4 vias
v4: diameter 0.95, hole 0.95, Top Layer to Bottom Layer, 2 vias

## Nets (pads, with @x,y where several pads share a name; then routed paths per layer and width w, separated by ;. In a path a pad name is that pad's centre, name@x,y a point inside that pad or via, vN(x,y) a via of type N, cw(c..) or ccw(c..) an arc to the next point about the centre after c; other vN are vias at no path point)
1_a: R13.2 U3.7 | length 3.2
  Bottom Layer w0.254: R13.2 67.66,168.835 U3.7
1_b: R11.2 U3.6 | length 3.2
  Bottom Layer w0.254: R11.2 U3.6
1_c: R9.2 U3.4 | length 3.7
  Bottom Layer w0.254: U3.4 67.66,134.985 R9.2
1_d: R7.2 U3.3 | length 3.7
  Bottom Layer w0.254: R7.2 65.12,135.005 U3.3
1_e: R5.2 U3.2 | length 3.7
  Bottom Layer w0.254: U3.2 62.58,135.005 R5.2
1_f: R1.2 U3.9 | length 3.2
  Bottom Layer w0.254: U3.9 62.58,168.795 R1.2
1_g: R3.2 U3.10 | length 3.2
  Bottom Layer w0.254: R3.2 60.04,168.815 U3.10
2_a: R14.2 U4.7 | length 3.1
  Bottom Layer w0.254: R14.2 102.96,168.935 U4.7
2_b: R12.2 U4.6 | length 3.1
  Bottom Layer w0.254: R12.2 U4.6
2_c: R10.2 U4.4 | length 3.6
  Bottom Layer w0.254: R10.2 102.96,134.865 U4.4
2_d: R8.2 U4.3 | length 3.7
  Bottom Layer w0.254: U4.3 100.42,134.845 R8.2
2_e: R6.2 U4.2 | length 3.6
  Bottom Layer w0.254: U4.2 97.88,134.905 R6.2
2_f: R2.2 U4.9 | length 3.1
  Bottom Layer w0.254: R2.2@97.88,168.895 U4.9
  Bottom Layer w0.5: R2.2@97.88,168.895 R2.2
2_g: R4.2 U4.10 | length 3.2
  Bottom Layer w0.254: R4.2@95.34,168.815 U4.10
  Bottom Layer w0.5: R4.2 R4.2@95.34,168.815
3.3V: U7.4 U8.5 U9.1 | length 125.7
  Top Layer w0.254: U9.1 v1(127.8,123.6) ; v1(127.8,94.6) 143.275,94.6 U7.4
  Top Layer w0.3: v1(64.575,90.025) 64.575,87.725 65.7,86.6 v1(127.2,86.6)
  Bottom Layer w0.254: v1(127.8,94.6) 127.855,94.655 127.855,123.545 v1(127.8,123.6)
  Bottom Layer w0.3: v1(64.575,90.025) U8.5 ; v1(127.2,86.6) 127.2,94 v1(127.8,94.6)
3_a: R21.2 U6.7 | length 3.3
  Bottom Layer w0.254: U6.7 138.06,168.715 R21.2
3_b: R20.2 U6.6 | length 3.3
  Bottom Layer w0.254: R20.2 140.6,171.94 U6.6@140.66,172
3_c: R19.2 U6.4 | length 4.1
  Top Layer w0.254: U6.4@138.16,131.36 138.16,131.18 U6.4@138.18,131.16
  Bottom Layer w0.254: U6.4@138.1,131.5 R19.2
3_d: R18.2 U6.3 | length 4.1
  Top Layer w0.254: U6.3@135.64,131.16 U6.3@135.64,131.36
  Bottom Layer w0.254: U6.3@135.58,131.5 135.58,135.405 R18.2
3_e: R17.2 U6.2 | length 4.1
  Top Layer w0.254: U6.2@133.06,131.36 133.06,131.2 U6.2@133.1,131.16
  Bottom Layer w0.254: U6.2@133,131.5 R17.2
3_f: R15.2 U6.9 | length 3.3
  Bottom Layer w0.254: U6.9 132.98,168.695 R15.2
3_g: R16.2 U6.10 | length 3.3
  Bottom Layer w0.254: U6.10 130.44,168.735 R16.2
5V: J1.5 J2.5 J3.2 R23.2 U1.16 U2.16 U3.1 U3.5 U4.1 U4.5 U5.16 U6.1 U6.5 U9.31 | length 324
  Top Layer w0.5: v1(51.8,110) 51.8,123.06 U3.1 ; U6.5@140.5,131.3 139.6,130.4 131.32,130.4 130.42,131.3 v1(120.7,131.3) U4.5 104.646,130.446 96.194,130.446 U4.1 95.286,131.354 70.254,131.354 U3.5 69.3,130.4 60.94,130.4 U3.1 ; v1(151.3,124.7) 151.3,136.6 v1(134,153.9) v1(99,153.9) v1(64.2,153.9) 60.04,149.74 U3.1
  Bottom Layer w0.254: U1.16 64.175,153.875 v1(64.2,153.9) ; U2.16 98.975,153.875 v1(99,153.9) ; U5.16 133.975,153.875 v1(134,153.9)
  Bottom Layer w0.5: J1.5@49.4,110.1 51.646,110.1 51.746,110 v1(51.8,110) ; R23.2 75.375,96.775 75.55,96.6 75.575,96.6 76.475,95.7 90.8,95.7 J3.2@97.3,89.2 ; U4.1 95.34,126.96 97.3,125 J3.2@97.3,89.2 ; J3.2 J3.2@97.3,89.2 ; v1(120.7,131.3) 120.7,123.64 U9.31 ; v1(151.3,124.7) 151.33,124.67 J2.5
12V: J1.1 J2.1 J3.1 | length 165.3
  Bottom Layer w1: J1.1@49.4,122.1 J1.1 44.5,122.1 41.2,118.8 41.2,88.5 43.1,86.6 94.275,86.6 94.275,87.025 96,85.3 131.3,85.3 151.33,105.33 J2.1
A1: U1.5 U9.33 | length 80.4
  Top Layer w0.254: v1@70.916,125.1 83,125.1 87,121.1 116.9,121.1 119.48,118.52 U9.33
  Bottom Layer w0.254: U1.5 68.388,151.237 69.001,151.237 69.008,151.231 69.469,151.231 70.931,149.769 70.931,125.131 v1(70.916,125.116)
A2: U2.5 U9.3 | length 44.6
  Bottom Layer w0.254: U2.5 103.388,151.237 104.001,151.237 104.008,151.231 104.551,151.231 106.092,149.69 106.092,143.717 104.7,142.325 104.7,134.025 116.425,122.3 118.925,119.8 122,119.8 U9.3
A3: U5.5 U9.23 | length 108.4
  Top Layer w0.254: U9.23 78.88,117.2 v1(116.3,117.2) ; v1(110.2,126.1) 139.8,126.1 141.1,127.4 v1(141.4,127.4)
  Bottom Layer w0.254: v1(110.2,126.1) 110.2,123.3 v1(116.3,117.2) ; U5.5 138.375,151.25 139.675,151.25 141.4,149.525 v1(141.4,127.4)
AMS_LED: J2.4 U9.47 | length 83.8
  Top Layer w0.254: U9.47 118.94,108.36 120.071,107.229 124.429,107.229 125.56,108.36 141.66,108.36 144.5,111.2 150.5,111.2 v1(151.3,112)
  Bottom Layer w0.254: v1(151.3,112) 152.564,112 153.171,112.607 153.171,118.329 152.1,119.4 J2.4
B1: U1.3 U9.34 | length 84.4
  Top Layer w0.254: v1(73,126.5) 82.4,126.5 86.431,122.469 116.931,122.469 119.471,119.929 120.93,119.929 121.9,118.959 121.9,117.14 U9.34
  Bottom Layer w0.254: U1.3 68.388,152.537 69.001,152.537 69.008,152.531 69.944,152.531 73,149.475 v1(73,126.5)
B2: U2.3 U9.4 | length 47.7
  Bottom Layer w0.254: U2.3 103.312,152.537 102.699,152.537 102.692,152.531 102.624,152.531 101.8,151.707 101.8,144.318 104.192,141.926 104.192,133.642 111.75,126.084 111.75,125.5 119.99,117.26 122,117.26 U9.4
B3: U5.3 U9.37 | length 67.7
  Top Layer w0.254: U9.37 121.88,109.5 140.9,109.5 v1(143.3,111.9)
  Bottom Layer w0.254: U5.3 138.394,152.531 140.044,152.531 143.3,149.275 v1(143.3,111.9)
C1: U1.2 U9.35 | length 90.3
  Top Layer w0.254: v1(74,115.7) 74,114.6 76.4,112.2 80.7,112.2 81.94,113.44 U9.35
  Bottom Layer w0.254: U1.2 68.388,153.187 69.001,153.187 69.008,153.181 70.194,153.181 74,149.375 v1(74,115.7)
C2: U2.2 U9.22 | length 66.4
  Top Layer w0.254: v1(87.7,129.8) 87.715,129.815 104.907,129.815 105.392,130.3 v1(111.9,130.3)
  Bottom Layer w0.254: U9.22 78.7,122.2 78.7,123.799 84.701,129.8 v1(87.7,129.8) ; v1@87.7,129.7 v1@87.9,129.9 ; U2.2 103.388,153.187 104.001,153.187 104.008,153.181 104.367,153.181 107.5,150.048 107.5,134.7 v1(111.9,130.3)
C3: U5.2 U9.38 | length 74.5
  Top Layer w0.254: U9.38 121.96,104.6 141,104.6 v1(144.4,108)
  Bottom Layer w0.254: U5.2 140.4,153.225 144.4,149.225 v1(144.4,108)
CAN0_RX: U8.4 U9.5 | length 77.9
  Top Layer w0.254: v1@89.5,92.6 v1(125.2,92.6)
  Bottom Layer w0.254: U8.4 70.377,92.995 70.772,92.6 v1(89.4,92.6) ; U9.5 126.428,110.292 126.34,93.728 v1(125.2,92.6)
CAN0_TX: U8.1 U9.6 | length 63.4
  Top Layer w0.254: v1(72.416,96.805) v1(75.8,100.189) ; v1(81.7,109.5) 121.162,109.5 121.67,110.008 122.388,110.008 U9.6
  Bottom Layer w0.254: U8.1 v1(72.416,96.805) ; v1(75.8,100.189) 75.8,106 76.9,107.1 80.8,107.1 81.7,108 v1(81.7,109.5)
CAN1_POWER: C1.2 R23.1 U8.3 | length 6.3
  Bottom Layer w0.5: U8.3 73.715,94.265 C1.2 73.825,94.375 R23.1
CAN_H1: J3.3 JP1.2 JP2.2 JP3.2 U8.7 | length 73.6
  Top Layer w0.5: v1(70.1,90) 70.4,90 70.7,89.7 97.6,89.7 v1(98.9,88.4)
  Bottom Layer w0.5: JP1.2 43.9,92.7 43.9,100.7 JP2.2 54.2,102.2 60.271,96.129 63.475,96.129 64.05,95.554 64.556,95.554 U8.7 65.765,95.535 70.1,91.2 v1(70.1,90) ; v1(98.9,88.4) 100.2,88.4 J3.3
CAN_L1: J3.4 JP1.1 R24.1 R25.1 U8.6 | length 66
  Top Layer w0.5: v1@68.9,90.4 69.4,90.9 99.4,90.9 v1(101.9,88.4)
  Bottom Layer w0.5: JP1.1 49.8,93.06 R24.1 R25.1 63.163,95.375 64.131,94.407 64.131,94.311 64.177,94.265 U8.6 65.735,94.265 68.9,91.1 v1(68.9,90.3) ; v1(101.9,88.4) 103.225,88.4 J3.4
D1: U1.4 U9.36 | length 90.7
  Top Layer w0.254: v1(72,117.6) 72,114.8 77.1,109.7 80.7,109.7 81.9,110.9 U9.36
  Bottom Layer w0.254: U1.4 68.388,151.887 69.001,151.887 69.008,151.881 69.682,151.881 72,149.563 v1(72,117.6)
D2: U2.4 U9.43 | length 63.5
  Top Layer w0.254: v1(90.58,129) v1(112,129)
  Bottom Layer w0.254: U9.43 v1(90.58,129) ; U2.4 103.388,151.887 104.001,151.887 104.008,151.881 104.619,151.881 106.6,149.9 106.6,134.4 111.269,129.731 111.269,129.697 111.697,129.269 111.731,129.269 v1(112,129)
D3: U5.4 U9.39 | length 78.8
  Top Layer w0.254: v1(118.159,101.716) 120.775,99.1 123.8,99.1 125.3,100.6 v1(131.8,100.6)
  Bottom Layer w0.254: v1(118.159,101.716) 119.724,103.28 U9.39 ; v1(131.8,100.6) 135.4,100.6 142.2,107.4 142.2,149.575 139.888,151.887 138.388,151.887 U5.4
DETECT_SWITCH: U7.9 U9.50 | length 68
  Top Layer w0.254: U9.50 89.24,91.6 106.134,91.6 108.659,89.075 U7.9
FLT_IND: J2.2 U9.44 | length 89.8
  Top Layer w0.254: U9.44 v1(117.02,115.98) ; v1(125.6,102.6) 140.881,102.6 143.79,105.508 148.108,105.508 v1(149.9,107.3)
  Bottom Layer w0.254: v1(117.02,115.98) 117.02,110.28 120.1,107.2 123.688,107.2 125.6,105.289 v1(125.6,102.6) ; v1(149.9,107.3) 149.4,107.8 149.4,112.3 149.992,112.892 150.822,112.892 J2.2
FLT_LED1: J1.2 U9.45 | length 33
  Bottom Layer w0.254: J1.2@49.4,119.1 50.3,119.1 51.7,117.7 55.441,117.7 58.441,114.7 78.84,114.7 U9.45
FLT_LED2: J1.3 U9.9 | length 89.8
  Top Layer w0.254: v1(46.7,107.2) 80.5,107.2 83.2,104.5 117.4,104.5 119.9,102 122,102 U9.9
  Bottom Layer w0.254: v1(46.7,107.2) 46.7,114.2 48.6,116.1 J1.3@49.4,116.1
FLT_LED3: J1.4 U9.10 | length 83.4
  Top Layer w0.254: v1@89.6,97.7 v1(89.62,97.68) v1(123.28,97.68)
  Bottom Layer w0.254: J1.4@49.4,113.1 50.3,113.1 51.6,111.8 61.5,111.8 71.881,101.419 75.62,97.68 v1(89.62,97.68) ; v1(123.28,97.68) U9.10
GND: C1.1 J1.10 J2.10 J3.5 JP1.3 R22.2 U1.7 U1.8 U2.7 U2.8 U5.7 U5.8 U7.6 U8.2 U9.21 U9.32
  other v1: 74.5,81.875 122.2,81.875 108.3,88.4 141.5,92.3 64.15,119.975 134.25,121.4 119,121.5 102.55,124.875 50.05,140.15 103.375,148.125 136.7,148.45 66.45,148.675 151.525,156.1 50.05,157.075 118.625,161.375 82.95,161.4 82.95,171.975 118.625,171.975
  other v3: 43.4,82.5 157.3,82.5 43.4,174.5 157.3,174.5
IMD_LED: J2.3 U9.46 | length 74.4
  Top Layer w0.254: U9.46 80.525,110.9 81.825,112.2 124.3,112.2 125.6,113.5 149.9,113.5 v1(151.3,114.9)
  Bottom Layer w0.254: v1(151.3,114.9) 151.33,114.93 J2.3
L1_60: JP3.1 R25.2 | length 3
  Bottom Layer w0.254: R25.2 JP3.1
L1_120: JP2.1 R24.2 | length 5.6
  Bottom Layer w0.254: JP2.1 48.235,96.825 R24.2
Latch1: pad.2@71.875,155.275 U1.1 | length 4.1
  Bottom Layer w0.254: U1.1 70.475,153.875 pad.2@71.875,155.275
Latch2: pad.2@106.525,155.675 U2.1 | length 3.9
  Bottom Layer w0.254: U2.1 104.725,153.875 pad.2@106.525,155.675
Latch3: pad.2@142.575,155.775 U5.1 | length 5.3
  Bottom Layer w0.254: U5.1 140.65,153.875 pad.2@142.8,156.025
NetR1_1: R1.1 U1.15 | length 16.3
  Bottom Layer w0.254: U1.15 61.2,153.225 60.508,153.917 60.508,165.083 62.45,167.025 R1.1
NetR2_1: R2.1 U2.15 | length 16.3
  Bottom Layer w0.254: U2.15 97.412,153.263 96.799,153.263 96.792,153.269 96.031,153.269 95.808,153.492 95.808,165.183 97.75,167.125 R2.1
NetR3_1: R3.1 U1.14 | length 16.3
  Bottom Layer w0.254: R3.1 60,153.625 61.05,152.575 U1.14
NetR4_1: R4.1 U2.14 | length 16.2
  Bottom Layer w0.254: R4.1 95.3,153.282 95.963,152.619 96.792,152.619 96.799,152.613 97.412,152.613 U2.14
NetR5_1: R5.1 U1.13 | length 17.7
  Bottom Layer w0.254: U1.13 62.412,151.887 61.799,151.887 61.792,151.881 61.206,151.881 60.284,150.959 60.284,146.979 62.6,144.663 R5.1
NetR6_1: R6.1 U2.13 | length 17.9
  Bottom Layer w0.254: U2.13 97.412,151.887 96.799,151.887 96.792,151.881 96.344,151.881 95.284,150.821 95.284,148.679 96,147.963 96,147.9 97.9,146 R6.1
NetR7_1: R7.1 U1.12 | length 17.6
  Bottom Layer w0.254: U1.12 62.412,151.237 61.799,151.237 61.792,151.231 61.381,151.231 60.792,150.642 60.792,147.19 65.1,142.882 R7.1
NetR8_1: R8.1 U2.12 | length 17.8
  Bottom Layer w0.254: U2.12 97.412,151.237 96.799,151.237 96.792,151.231 96.413,151.231 95.792,150.61 95.792,148.89 100.5,144.182 R8.1
NetR9_1: R9.1 U1.11 | length 17.5
  Bottom Layer w0.254: U1.11 61.525,150.625 61.3,150.4 61.3,147.4 67.7,141 R9.1
NetR10_1: R10.1 U2.11 | length 17.7
  Bottom Layer w0.254: U2.11 97.412,150.587 96.799,150.587 96.792,150.581 96.481,150.581 96.3,150.4 96.3,149.1 102.9,142.5 R10.1
NetR11_1: R11.1 U1.10 | length 33.7
  Bottom Layer w0.254: U1.10 64.475,149.975 65.2,150.7 65.2,156.862 66.5,158.162 66.5,172.1 67.2,172.8 68.3,172.8 68.9,172.2 68.9,168.175 70.05,167.025 R11.1
NetR12_1: R12.1 U2.10 | length 33.3
  Bottom Layer w0.254: U2.10 99.575,149.975 99.892,150.292 99.892,156.854 101.8,158.762 101.8,171.814 102.657,172.671 103.263,172.671 104,171.934 104,168.475 105.35,167.125 R12.1
NetR13_1: R13.1 U1.9 | length 21.1
  Bottom Layer w0.254: U1.9 62.488,149.363 63.101,149.363 63.108,149.369 64.587,149.369 65.708,150.49 65.708,156.652 67.6,158.544 R13.1
NetR14_1: R14.1 U2.9 | length 21.5
  Bottom Layer w0.254: U2.9 97.488,149.363 98.101,149.363 98.108,149.369 99.969,149.369 100.4,149.8 100.4,156.644 102.9,159.144 R14.1
NetR15_1: R15.1 U5.15 | length 15.9
  Bottom Layer w0.254: U5.15 132.412,153.263 131.799,153.263 131.792,153.269 131.249,153.269 131.008,153.51 131.008,165.083 132.85,166.925 R15.1
NetR16_1: R16.1 U5.14 | length 15.9
  Bottom Layer w0.254: R16.1 130.5,153.3 131.181,152.619 131.792,152.619 131.799,152.613 132.412,152.613 U5.14
NetR17_1: R17.1 U5.13 | length 17.4
  Bottom Layer w0.254: U5.13 132.412,151.887 131.799,151.887 131.792,151.881 131.281,151.881 130.353,150.953 130.353,148.21 133,145.563 R17.1
NetR18_1: R18.1 U5.12 | length 17.3
  Bottom Layer w0.254: U5.12 132.412,151.237 131.799,151.237 131.792,151.231 131.349,151.231 130.861,150.743 130.861,148.421 135.6,143.682 R18.1
NetR19_1: R19.1 U5.11 | length 17.2
  Bottom Layer w0.254: U5.11 132.412,150.587 131.799,150.587 131.792,150.581 131.481,150.581 131.369,150.469 131.369,148.631 138.1,141.9 R19.1
NetR20_1: R20.1 U5.10 | length 33.4
  Bottom Layer w0.254: U5.10 133.975,149.975 134.761,150.761 134.761,156.923 137,159.162 137,172.2 137.531,172.731 138.423,172.731 139.4,171.754 139.4,167.975 140.45,166.925 R20.1
NetR21_1: R21.1 U5.9 | length 20.9
  Bottom Layer w0.254: U5.9 132.488,149.363 133.101,149.363 133.108,149.369 134.087,149.369 135.269,150.551 135.269,156.713 138.1,159.544 R21.1
Phase1: pad.2@69.8,147.475 U1.6 | length 4.3
  Bottom Layer w0.254: U1.6 69.225,150.625 69.8,150.05 pad.2@69.8,147.475
Phase2: pad.2@104.875,147.35 U2.6 | length 4.4
  Bottom Layer w0.254: U2.6 104.275,150.625 104.875,150.025 pad.2@104.875,147.35
Phase3: pad.2@140.15,147.775 U5.6 | length 4.2
  Bottom Layer w0.254: U5.6 139.425,150.625 140.15,149.9 pad.2@140.15,147.775
SSI0_CLK: U7.5 U9.30 | length 69.7
  Top Layer w0.254: U9.30 77.772,100.74 78.903,101.871 80.629,101.871 89.025,93.475 U7.5
SSI0_FSS: U7.2 U9.29 | length 69.4
  Top Layer w0.254: U9.29 78.78,104.5 81.6,104.5 89.325,96.775 U7.2
SSI0_RX: U7.3 U9.28 | length 70.4
  Top Layer w0.254: v1(82.2,102.3) 88.825,95.675 U7.3
  Bottom Layer w0.254: U9.28 78.88,104.5 80.7,104.5 82.2,103 v1(82.2,102.3)
SSI0_TX: U7.7 U9.8 | length 41.9
  Top Layer w0.254: v1(118.425,91.275) U7.7
  Bottom Layer w0.254: v1(118.425,91.275) 118.425,100.225 120.349,102.149 121.208,102.149 121.871,102.812 121.871,104.411 U9.8
SSI1_CLK: J2.6 U9.41 | length 93.9
  Top Layer w0.254: v1(84.5,127.2) v1(124.5,127.2) ; v1(127.124,103.395) 140.829,103.395 146.4,108.966 v1(146.4,109)
  Bottom Layer w0.254: U9.41 83.7,127.2 v1(84.5,127.2) ; v1(124.5,127.2) 124.5,125.866 127.1,123.266 127.1,103.419 v1(127.124,103.395) ; v1(146.4,109) 146.4,109.072 146.7,109.372 J2.6
SSI1_FSS: J2.7 U9.42 | length 85.8
  Top Layer w0.254: v1(87.6,128.6) 87.931,128.269 145.031,128.269 149.1,124.2 149.1,117.4 v1(146.7,115)
  Bottom Layer w0.254: U9.42 87.6,128.56 v1(87.6,128.6) ; J2.7 v1(146.7,115)
SSI1_RX: J2.8 U9.24 | length 72.4
  Top Layer w0.254: U9.24 78.74,114.8 124.8,114.8 127.9,117.9 v1(146.7,117.9)
  Bottom Layer w0.254: J2.8 v1(146.7,117.9)
SSI1_TX: J2.9 U9.40 | length 45.4
  Top Layer w0.254: U9.40 120.782,100.782 121.722,100.782 122.812,101.871 125.295,101.871 125.297,101.869 140.869,101.869 144,105 v1(148.7,105)
  Bottom Layer w0.254: J2.9 147.475,119.4 148.7,118.175 v1(148.7,105)
SSI2_CLK: J1.6 U9.7 | length 79.5
  Top Layer w0.254: v1(54,123.6) 55.2,122.4 82.1,122.4 86.3,118.2 116.7,118.2 v1(119,115.9)
  Bottom Layer w0.254: v1(54,123.6) 54.03,123.57 J1.6@54.03,122.1 ; v1(119,115.9) 120.1,114.8 121,114.8 122.1,113.7 122.1,109.54 U9.7
SSI2_FSS: J1.7 U9.2 | length 75.2
  Top Layer w0.254: v1(69.4,127.3) 82.318,127.3 86.641,122.977 119.764,122.977 120.272,122.469 121.516,122.469 122.687,121.298 123.042,121.298 U9.2
  Bottom Layer w0.254: J1.7@54.03,119.1 54.9,119.1 63.1,127.3 v1(69.4,127.3)
SSI2_RX: J1.8 U9.27 | length 30.2
  Bottom Layer w0.254: J1.8@54.03,116.1 54.9,116.1 57.392,113.608 75.57,113.608 77.147,112.031 78.028,112.031 78.8,111.259 78.8,109.6 U9.27
SSI2_TX: J1.9 U9.26 | length 24.4
  Bottom Layer w0.254: J1.9@54.03,113.1 75.36,113.1 U9.26
STBY: R22.1 U8.8 | length 4
  Bottom Layer w0.254: R22.1@61.32,98.505 R22.1 61.325,98.525 61.623,98.227 61.623,98.202 63.02,96.805 U8.8
pads on no net: U3.8 U4.8 U6.8 U7.1 U7.8 U7.10 U9.25 U9.48 U9.49
copper on no net:
  other v2: 92.185,83.125 108.485,83.125 44.018,107.95 156.71,108.25 44.018,124.25 156.71,124.55
  other v4: 154.725,92.45 154.725,99.25

## Polygon pours and split planes (outlines as drawn)
GND on Bottom Layer "Bottom Ground Plane" (solid, remove dead copper, pour order 76): 43.5,178.5 ccw(c43.5,174.4) 39.4,174.4 39.4,82.5 ccw(c43.4,82.5) 43.4,78.5 157.3,78.5 ccw(c157.3,82.5) 161.3,82.5 161.3,174.5 ccw(c157.3,174.5) 157.3,178.5
GND on Top Layer "Top Ground Plane" (solid, remove dead copper, pour order 64): 41.389,172.048 45.896,177.748 154.288,177.748 159.189,171.548 159.189,85.648 154.525,79.748 45.817,79.748 41.389,85.348

## Other copper
Top Layer:
  pour cut-out: 73.375,116
  pour cut-out: 74.435,116.135 74.236,116.269 72.236,118.169 71.975,117.908 71.975,117.05
  pour cut-out: 132.416,100.6 132.416,101.559 132.35,101.625 131.875,101.625
  pour cut-out: 143.295,111.903 144.495,111.203 144.445,111.203 144.095,110.853 142.695,111.253
  pour cut-out: 99.2,88.1 102.2,88.1 101.3,89 101.3,89.1 98.3,89.1 98.25,89.05
  pour cut-out: 87.6,128.6 86.15,127.15 86.7,127.15 87.819,128.269 87.931,128.269

## Silkscreen, mask and mechanical layers (free items; w line width, h text height)
Top Overlay:
  lines w0.254: 37.592,80.063 38.1,78.539 ; 37.592,177.015 38.1,178.539 ; 37.846,78.539 38.354,78.539 ; 37.846,178.539 38.354,178.539 ; 38.1,122.8 38.1,78.539 ; 38.1,134.277 38.1,178.539 ; 38.608,80.063 38.1,78.539 ; 38.608,177.015 38.1,178.539 ; 39.442,179.446 39.442,179.954 ; 40.966,179.192 39.442,179.7 ; 40.966,180.208 39.442,179.7 ; 93.383,179.7 39.442,179.7 ; 107.4,179.7 161.342,179.7 ; 159.818,179.192 161.342,179.7 ; 159.818,180.208 161.342,179.7 ; 161.342,179.446 161.342,179.954
  text "121.9 (mm)" at 93.637,178.786 h1.52
  text "DASHBOARD / REV0" at 159.3,144.8 h2 r90
  text "3" at 47.8,137.6 h8 r90
  text "100 (mm)" at 39.014,123.054 h1.52 r90
  text "z" at 123.2,79.6 h3
Bottom Overlay:
  lines w0.1: 56.25,109.025 73.675,109.025 ; 56.375,123 73.655,123 cw(c73.655,122.355) 74.3,122.355 74.3,109.625 ; 73.655,109.03 ccw(c73.626,109.704) 74.3,109.675 ; 127.55,122.705 127.55,110.07 ccw(c128.195,110.07) 128.195,109.425 144.45,109.425 ; 127.555,122.705 cw(c128.2,122.705) 128.2,123.35 144.575,123.35
  text "Latch3" at 143.4,155.25 h1
  text "Latch2" at 107.35,155.175 h1
  text "Latch1" at 72.9,154.775 h1
  text "Phase3" at 141.025,147.325 h1
  text "Phase1" at 70.5,146.975 h1
  text "Phase2" at 105.65,146.9 h1
  text "5V" at 113.7,123.1 h1
  text "3.3V" at 118.7,123.1 h1
  text "GND" at 135.93,121.9 h1
  text "5V" at 143.93,121.9 h1
  text "12V" at 59.698,121.6 h1
  text "SSI2_CLK" at 73.698,121.6 h1
  text "SSI1_TX" at 135.93,118.9 h1
  text "AMS_LED" at 143.93,118.9 h1
  text "FLT_LED1" at 64.498,118.6 h1
  text "SSI2_FSS" at 73.698,118.6 h1
  text "SSI1_RX" at 135.93,115.9 h1
  text "IMD_LED" at 143.93,115.9 h1
  text "FLT_LED2" at 64.798,115.7 h1
  text "SSI2_RX" at 72.798,115.7 h1
  text "SSI1_FSS" at 135.93,113.1 h1
  text "FLT_IND" at 143.93,113 h1
  text "FLT_LED2" at 64.798,112.7 h1
  text "SSI2_TX" at 72.798,112.7 h1
  text "SSI1_CLK" at 135.93,110.1 h1
  text "12V" at 143.93,109.9 h1
  text "5V" at 58.798,109.5 h1
  text "GND" at 69.1,109.3 h1
  text "CAN_H1" at 43.9,101.8 h0.8
  text "CAN_H1" at 52.8,101.76 h0.8
  text "L1_120" at 43.9,99.2 h0.8
  text "L1_60" at 52.8,99.16 h0.8
  text "GND" at 44,93.2 h0.8
  text "CAN_H1" at 44,90.7 h0.8
  text "12V" at 93.85,90.45 h1 r270
  text "5V" at 96.837,90.45 h1 r270
  text "CAN_H" at 99.825,90.45 h1 r270
  text "CAN_L" at 102.85,90.45 h1 r270
  text "GND" at 105.8,90.45 h1 r270
  text "CAN_L1" at 44,88.3 h0.8
  text "FARAZ BORGHEI" at 72.1,80.1 h2
Board Outline:
  the board outline again, w0.1